# EAGLE board display_tabs (EAGLE 5.06)
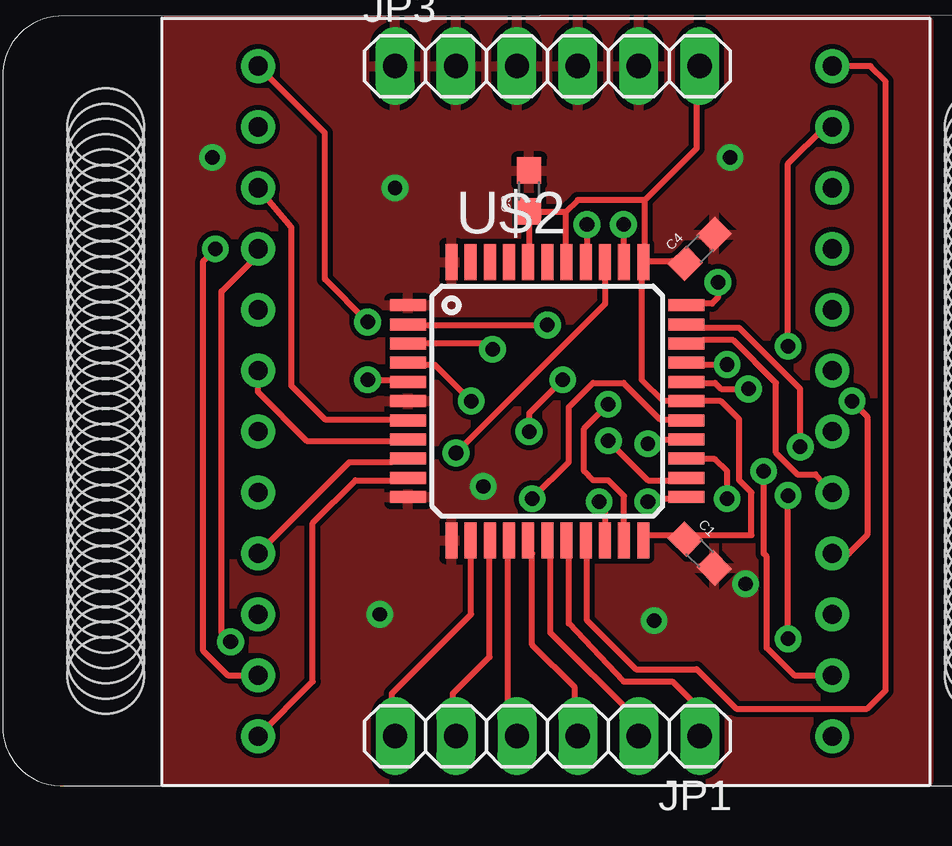
[diagram p0: board, top side]
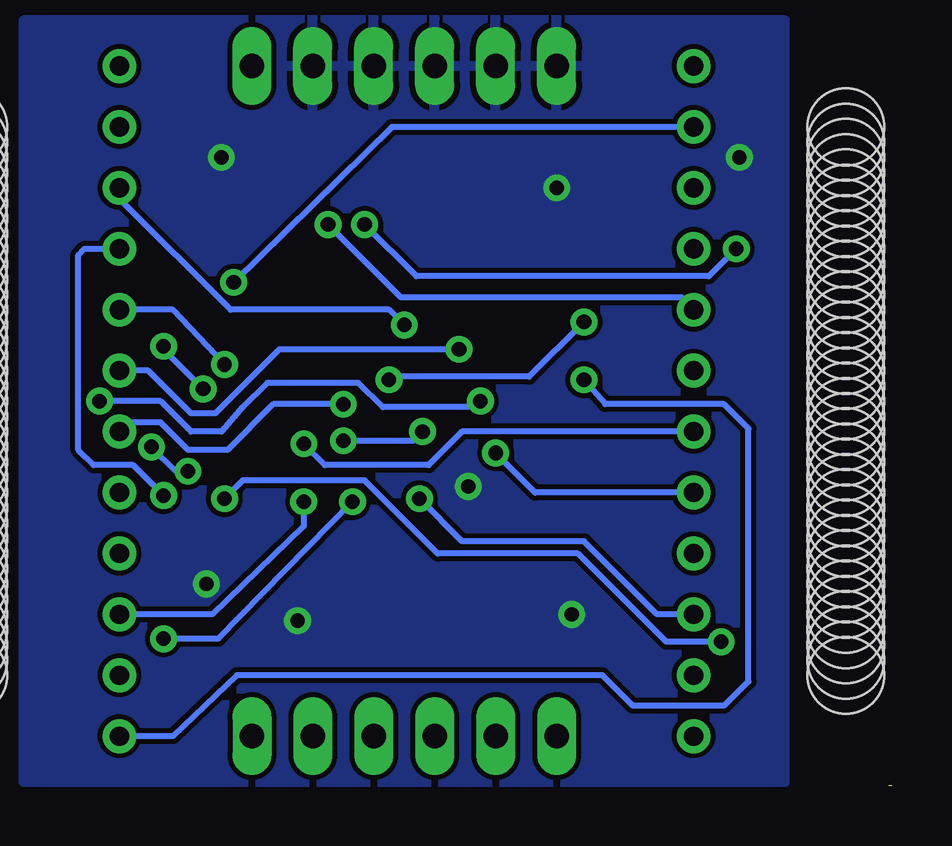
[diagram p1: board, bottom side, seen from below]

Size 0.12 x 0.01 mm. Coordinates in mm from the lower left corner, seen from the top.
Outline: 0,0 0.12,0.01
Copper layers (1*16): Top 0.035mm / dielectric 1.5mm / Bottom 0.035mm
Design rules "SparkFun": minimum track width 8mil, minimum drill 20mil, track to track 8mil, track to pad 8mil, pad to pad 8mil, via to via 8mil, smd to smd 8mil, copper to edge 10mil, drill to drill 8mil, minimum pad ring 12mil, minimum via ring 10mil, stop-mask expansion 4mil, vias tented up to drill 25mil, thermal gap 10mil
Holes 3.2 mm at 1.9,27.46 1.9,26.83 1.9,26.2 1.9,25.56 1.9,24.92 1.9,24.29 1.9,23.65 1.9,23.02 1.9,22.38 1.9,21.75 1.9,21.11 1.9,20.48 1.9,19.84 1.9,19.21 1.9,18.57 1.9,17.94 1.9,17.3 1.9,16.67 1.9,16.04 1.9,15.4 1.9,14.77 1.9,14.13 1.9,13.5 1.9,12.86 1.9,12.22 1.9,11.59 1.9,10.96 1.9,10.32 1.9,9.69 1.9,9.05 1.9,8.42 1.9,7.78 1.9,7.15 1.9,6.51 1.9,5.24 1.9,4.61 38.48,27.46 38.48,26.83 38.48,26.2 38.48,25.56 38.48,24.92 38.48,24.29 38.48,23.65 38.48,23.02 38.48,22.38 38.48,21.75 38.48,21.11 38.48,20.48 38.48,19.84 38.48,19.21 38.48,18.57 38.48,17.94 38.48,17.3 38.48,16.67 38.48,15.4 38.48,16.04 38.48,14.77 38.48,14.13 38.48,13.5 38.48,12.86 38.48,12.22 38.48,11.59 38.48,10.96 38.48,10.32 38.48,9.69 38.48,9.05 38.48,8.42 38.48,7.78 38.48,7.15 38.48,6.51 38.48,5.88 38.48,5.24 38.48,4.61 1.9,5.88

## Footprints (pad centres in the part's own frame; a part is rotated, then mirrored left to right if it is on the bottom)
0603 = smd 1.1 x 1: 1 -0.85,0; 2 0.85,0
1X06 = drill 1.016 long: 1 -6.35,0; 2 -3.81,0; 3 -1.27,0; 4 1.27,0; 5 3.81,0; 6 6.35,0
FYM-12881ABXX = drill 0.8 round: P$1 0,0; P$2 0,-2.54; P$3 0,-5.08; P$4 0,-7.62; P$5 0,-10.16; P$6 0,-12.7; P$7 0,-15.24; P$8 0,-17.78; P$9 0,-20.32; P$10 0,-22.86; P$11 0,-25.4; P$12 0,-27.94; P$13 23.94,-27.94; P$14 23.94,-25.4; P$15 23.94,-22.86; P$16 23.94,-20.32; P$17 23.94,-17.78; P$18 23.94,-15.24; P$19 23.94,-12.7; P$20 23.94,-10.16; P$21 23.94,-7.62; P$22 23.94,-5.08; P$23 23.94,-2.54; P$24 23.94,0
TQFP44 = smd 1.5 x 0.5: 1 -5.8,4; 2 -5.8,3.2; 3 -5.8,2.4; 4 -5.8,1.6; 5 -5.8,0.8; 6 -5.8,0; 7 -5.8,-0.8; 8 -5.8,-1.6; 9 -5.8,-2.4; 10 -5.8,-3.2; 11 -5.8,-4; 23 5.8,-4; 24 5.8,-3.2; 25 5.8,-2.4; 26 5.8,-1.6; 27 5.8,-0.8; 28 5.8,0; 29 5.8,0.8; 30 5.8,1.6; 31 5.8,2.4; 32 5.8,3.2; 33 5.8,4 | smd 0.5 x 1.5: 12 -4,-5.8; 13 -3.2,-5.8; 14 -2.4,-5.8; 15 -1.6,-5.8; 16 -0.8,-5.8; 17 0,-5.8; 18 0.8,-5.8; 19 1.6,-5.8; 20 2.4,-5.8; 21 3.2,-5.8; 22 4,-5.8; 34 4,5.8; 35 3.2,5.8; 36 2.4,5.8; 37 1.6,5.8; 38 0.8,5.8; 39 0,5.8; 40 -0.8,5.8; 41 -1.6,5.8; 42 -2.4,5.8; 43 -3.2,5.8; 44 -4,5.8

## Placement (x,y rotation side)
C1  [0603]  26.67,9.69 315 top  (outside the outline)
C3  [0603]  19.56,24.8 90 top  (outside the outline)
C4  [0603]  26.67,22.38 45 top  (outside the outline)
JP1  [1X06]  20.32,2.06 180 top  (outside the outline)
JP3  [1X06]  20.32,30 0 top  (outside the outline)
U$1  FYM-1228AXX  [FYM-12881ABXX]  8.25,30 0 top  (outside the outline)
U$2  MAX6960  [TQFP44]  20.32,16.04 0 top  (outside the outline)

## Library data of the parts
C1 C3 C4 = SparkFun
JP1 JP3 = pinhead
U$1 = john
U$2 = maxim

## Nets
CLK: JP1.2 U$2.17
CS: JP1.5 U$2.14
DIN: JP1.4 U$2.15
DOUT: JP1.3 U$2.16
GND: C1.2 C3.2 C4.2 JP3.1 JP3.2 JP3.3 JP3.4 JP3.5 U$2.1 U$2.6 U$2.11 U$2.12 U$2.44
N$1: U$1.P$24 U$2.19
N$2: U$1.P$21 U$2.20
N$3: U$1.P$18 U$2.21
N$4: U$1.P$15 U$2.23
N$5: U$1.P$1 U$2.24
N$6: U$1.P$4 U$2.25
N$7: U$1.P$7 U$2.26
N$8: U$1.P$10 U$2.27
N$9: U$1.P$23 U$2.29
N$10: U$1.P$20 U$2.30
N$11: U$1.P$17 U$2.31
N$12: U$1.P$14 U$2.32
N$13: U$1.P$2 U$2.33
N$14: U$1.P$5 U$2.35
N$15: U$1.P$8 U$2.36
N$16: U$1.P$11 U$2.37
OSC: JP1.6 U$2.13
ROW1: U$1.P$22 U$2.2
ROW2: U$1.P$19 U$2.3
ROW3: U$1.P$16 U$2.4
ROW4: U$1.P$13 U$2.5
ROW5: U$1.P$3 U$2.7
ROW6: U$1.P$6 U$2.8
ROW7: U$1.P$9 U$2.9
ROW8: U$1.P$12 U$2.10
RST: JP1.1 U$2.18
VCC: C1.1 C3.1 C4.1 JP3.6 U$2.22 U$2.28 U$2.34 U$2.38 U$2.40

## Tracks (layer width: path | path; a pad name or v marks a point on that pad's centre or on a via)
CLK
  Top 0.254: U$2.17 20.45,9.69 20.45,6.38 24,2.83 24,2.45 JP1.2
CS
  Top 0.254: U$2.14 17.91,9.69 17.91,5.37 16.38,3.84 16.38,2.83 JP1.5
DIN
  Top 0.254: U$2.15 18.67,9.69 18.67,3.33 JP1.4
DOUT
  Top 0.254: U$2.16 19.69,9.69 19.69,5.88 21.46,4.1 21.46,3.08 JP1.3
GND  (via drill 0.6)
  other vias: 27.94,26.2 13.34,7.15 28.57,8.42 17.65,12.48 24.77,6.89 6.35,26.2 13.97,24.92
  pour Bottom: 4.45,31.91 36.2,31.91 36.2,0.16 4.45,0.16
  pour Top: 4.45,31.91 36.2,31.91 36.2,0.16 4.45,0.16
N$1
  Top 0.254: U$2.19 21.97,9.69 21.97,6.89 24,4.86 26.54,4.86 28.19,3.21 33.66,3.21 34.42,3.97 34.42,29.37 33.78,30 U$1.P$24
N$2  (via drill 0.61)
  Top 0.254: v22.48,11.84 22.73,11.46 22.73,10.96 U$2.20 | v30.35,6.13 v30.35,12.1
  Bottom 0.254: v22.48,11.84 28.07,6.13 v30.35,6.13 | v30.35,12.1 31.62,13.37 33.27,13.37 33.91,14 33.91,22.13 33.66,22.38 U$1.P$21
N$3  (via drill 0.6)
  Top 0.254: U$2.21 23.52,12.07 22.86,12.73 22.23,12.73 21.84,13.11 21.84,14.89 v22.86,15.91
  Bottom 0.254: v22.86,15.91 25.78,15.91 27.69,14 29.34,14 30.48,15.15 31.88,15.15 32.26,14.77 U$1.P$18
N$4  (via drill 0.61)
  Top 0.254: v24.51,11.84 24.64,11.97 25.53,11.97 U$2.23
  Bottom 0.254: v24.51,11.84 24.51,10.83 28.32,7.15 U$1.P$15
N$5  (via drill 0.61)
  Top 0.254: v22.86,14.38 24.51,12.73 25.53,12.73 U$2.24 | v20.96,16.92 19.56,15.53 v19.56,14.77 | v12.83,19.34 11.05,21.11 11.05,27.21 U$1.P$1
  Bottom 0.254: v19.56,14.77 19.94,14.38 v22.86,14.38 | v20.96,16.92 20.7,17.05 15.11,17.05 v12.83,19.34
N$6  (via drill 0.61)
  Top 0.254: v27.81,11.97 27.81,13.11 27.3,13.62 26.04,13.62 U$2.25 | v7.11,6 6.73,6.38 6.73,20.61 8.25,22.13 | 8.25,22.13 8.25,22 | 8.25,22.13 U$1.P$4
  Bottom 0.254: v27.81,11.97 27.05,12.73 21.97,12.73 18.92,9.69 13.08,9.69 9.4,6 v7.11,6
N$7  (via drill 0.6)
  Top 0.254: U$2.26 24.69,14.44 v24.51,14.26
  Bottom 0.254: v24.51,14.26 23.62,13.37 19.3,13.37 17.91,14.77 U$1.P$7
N$8  (via drill 0.61)
  Top 0.254: v19.69,11.97 21.21,13.5 21.21,15.78 22.23,16.8 23.5,16.8 25.02,15.27 25.91,15.27 U$2.27
  Bottom 0.254: v19.69,11.97 17.91,10.19 12.83,10.19 9.78,7.15 U$1.P$10
N$9  (via drill 0.61)
  Top 0.254: v28.7,16.54 27.56,16.54 27.3,16.8 26.8,16.8 U$2.29 | v30.35,18.32 30.35,25.94 31.88,27.46 U$1.P$23
  Bottom 0.254: v28.7,16.54 30.35,18.19 v30.35,18.32
N$10  (via drill 0.61)
  Top 0.254: U$2.30 26.16,17.69 26.29,17.56 v27.81,17.56
  Bottom 0.254: v27.81,17.56 29.97,19.84 U$1.P$20
N$11
  Top 0.254: U$2.31 26.8,18.57 28.07,18.57 29.85,16.8 29.85,13.88 30.73,12.99 31.5,12.99 U$1.P$17
N$12  (via drill 0.61)
  Top 0.254: v30.86,14.13 30.86,16.54 28.32,19.08 26.8,19.08 U$2.32 | v29.34,13.11 29.34,9.69 29.46,9.56 29.46,5.75 30.61,4.61 U$1.P$14
  Bottom 0.254: v30.86,14.13 29.85,13.11 v29.34,13.11
N$13  (via drill 0.61)
  Top 0.254: v27.43,20.99 27.43,20.35 27.18,20.1 26.8,20.1 U$2.33
  Bottom 0.254: v27.43,20.99 20.83,27.46 U$1.P$2
N$14  (via drill 0.61)
  Top 0.254: v23.5,23.4 23.5,22.38 U$2.35
  Bottom 0.254: v23.5,23.4 20.45,20.35 8.76,20.35 U$1.P$5
N$15  (via drill 0.61)
  Top 0.254: v16.51,13.88 22.73,20.1 22.73,21.11 U$2.36
  Bottom 0.254: v16.51,13.88 14.86,12.22 U$1.P$8
N$16  (via drill 0.61)
  Top 0.254: v21.97,23.4 21.97,22.38 U$2.37 | v6.48,22.38 5.97,21.88 5.97,5.62 6.98,4.61 U$1.P$11
  Bottom 0.254: v21.97,23.4 19.81,21.24 7.62,21.24 v6.48,22.38
OSC
  Top 0.254: U$2.13 17.14,9.69 17.14,7.15 13.84,3.84 13.84,2.83 JP1.6
ROW1  (via drill 0.61)
  Top 0.254: v20.32,19.21 14.86,19.21 U$2.2
  Bottom 0.254: v20.32,19.21 20.96,19.84 27.56,19.84 32.13,24.42 32.13,24.8 U$1.P$22
ROW2  (via drill 0.61)
  Top 0.254: v18.03,18.19 17.78,18.45 14.73,18.45 U$2.3
  Bottom 0.254: v18.03,18.19 25.53,18.19 28.19,15.53 29.21,15.53 30.99,17.3 U$1.P$19
ROW3  (via drill 0.61)
  Top 0.254: v17.14,16.04 15.62,17.56 15.11,17.56 U$2.4 | v33.02,16.04 33.66,15.4 33.66,10.45 32.89,9.69 U$1.P$16
  Bottom 0.254: v17.14,16.04 17.4,15.78 21.21,15.78 22.23,16.8 26.04,16.8 27.05,15.78 27.94,14.77 29.21,14.77 30.48,16.04 v33.02,16.04
ROW4  (via drill 0.61)
  Top 0.254: v12.83,16.92 13.84,16.92 U$2.5
  Bottom 0.254: v12.83,16.92 11.94,15.91 6.98,15.91 5.97,14.89 5.97,4.35 6.98,3.33 10.79,3.33 12.07,4.61 27.3,4.61 29.97,2.06 U$1.P$13
ROW5
  Top 0.254: U$2.7 14.48,15.27 13.84,15.27 11.05,15.27 9.65,16.67 9.65,23.27 U$1.P$3
ROW6
  Top 0.254: U$2.8 13.97,14.38 10.29,14.38 8.25,16.42 U$1.P$6
ROW7
  Top 0.254: U$1.P$9 12.07,13.5 13.84,13.5 U$2.9
ROW8
  Top 0.254: U$1.P$12 10.54,4.35 10.54,10.96 12.32,12.73 13.84,12.73 U$2.10
RST
  Top 0.254: U$2.18 21.21,9.69 21.21,6.76 23.5,4.35 25.53,4.35 26.54,3.33 26.54,2.32 JP1.1
VCC
  Top 0.254: U$2.40 19.56,22.38 C3.1 19.94,23.69 19.94,23.91 21.08,23.91 | 21.08,23.91 21.08,22.38 U$2.38 | U$2.22 24.51,10.45 25.53,10.45 C1.1 26.54,10.45 28.83,10.45 28.83,12.22 28.32,12.73 28.32,15.27 27.56,16.04 U$2.28 25.15,16.04 24.26,16.92 24.26,21.11 U$2.34 | C4.1 25.53,21.88 24.51,21.88 U$2.34 | 21.08,23.91 21.59,24.42 24.38,24.42 | 24.38,24.42 24.38,22.38 U$2.34 | 24.38,24.42 26.54,26.58 26.54,29.88 JP3.6